# Altium PCB FlightController_Top_6x6.PcbDoc (part 6 of 6)
Units mm, origin at the board's own origin, x right, y up, seen from the top; angles counter-clockwise.
Board outline 149.8 x 149.8 mm, 2 copper layers (Top Layer, Bottom Layer); 156 components, 166 nets, 860 pads, 423 vias.
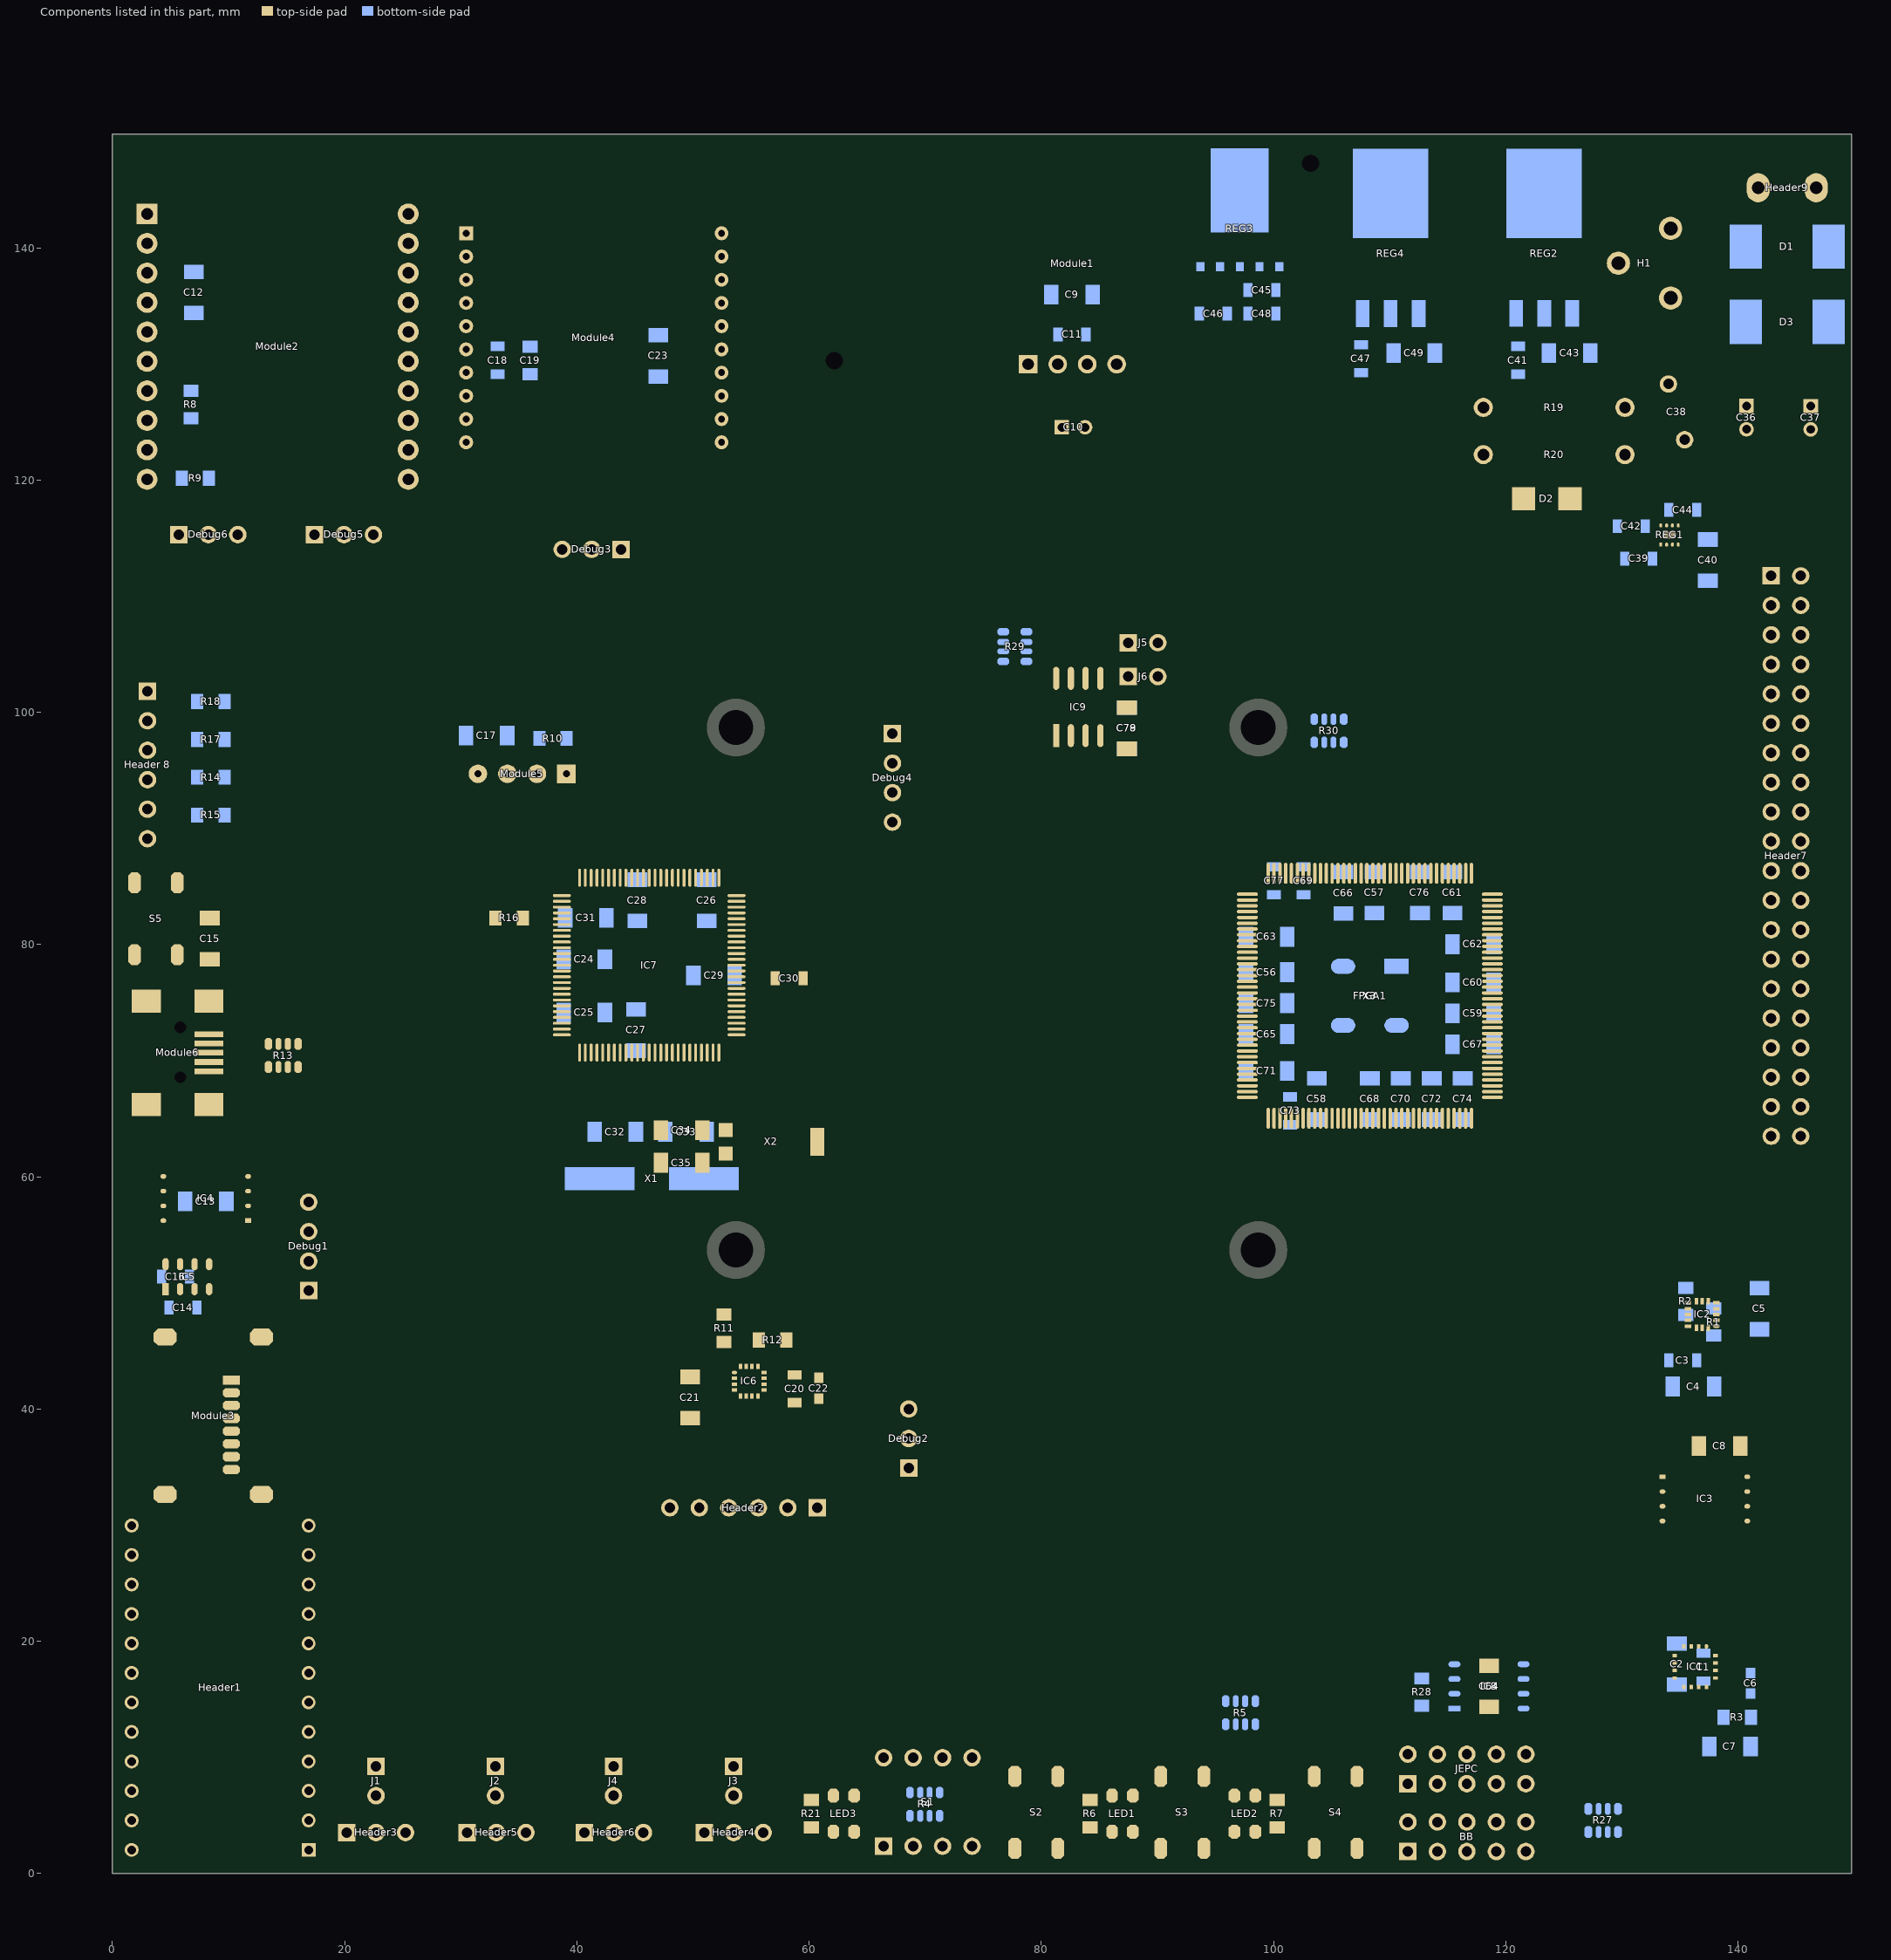
[diagram p6: the components of this part, seen from the top]

## Polygon pours and split planes (outlines as drawn) (continued)
no net on Top Layer "Socket Keepout" (solid, pour order 23): 23.876,118.618 27.305,118.618 27.305,145.161 24.13,145.161 24.003,145.288
no net on Top Layer "Socket Keepout" (solid, pour order 25): 4.191,87.757 4.191,103.378 1.524,103.378 1.524,87.757
no net on Top Layer "Socket Keepout" (solid, pour order 27): 18.167,59.092 18.167,48.932 15.627,48.932 15.627,59.092
no net on Top Layer "Socket Keepout" (solid, pour order 31): 3.048,0.254 0.254,0.254 0.254,31.496 3.048,31.496
no net on Top Layer "Socket Keepout" (solid, pour order 35): 17.907,31.242 15.875,31.242 15.875,0.635 18.034,0.635
no net on Top Layer "Socket Keepout" (solid, pour order 37): 21.433,10.511 23.973,10.511 23.973,5.431 21.433,5.431
no net on Top Layer "Socket Keepout" (solid, pour order 39): 18.893,2.256 26.513,2.256 26.543,2.286 26.543,4.699 18.923,4.699
no net on Top Layer "Socket Keepout" (solid, pour order 43): 29.21,4.826 36.83,4.826 36.885,4.771 36.885,2.256 29.265,2.256
no net on Top Layer "Socket Keepout" (solid, pour order 45): 39.382,2.256 39.37,2.268 39.37,4.953 46.99,4.953 47.002,4.941 47.002,2.256
no net on Top Layer "Socket Keepout" (solid, pour order 49): 49.699,2.256 49.699,4.995 49.784,5.08 57.404,5.08 57.404,2.341 57.319,2.256
no net on Top Layer "Socket Keepout" (solid, pour order 51): 54.779,10.511 52.239,10.511 52.239,5.431 54.779,5.431
no net on Top Layer "Socket Keepout" (solid, pour order 53): 44.42,5.431 44.42,10.511 41.88,10.511 41.88,5.431
no net on Top Layer "Socket Keepout" (solid, pour order 55): 31.72,10.511 34.26,10.511 34.26,5.431 34.163,5.334 31.623,5.334
no net on Top Layer "Socket Keepout" (solid, pour order 63): 65.081,8.81 65.151,8.88 65.151,11.43 75.438,11.43 75.381,11.373 75.381,8.81
no net on Top Layer "Socket Keepout" (solid, pour order 65): 75.381,3.51 75.381,0.451 75.311,0.381 65.151,0.381 65.151,3.44 65.081,3.51
no net on Top Layer "Socket Keepout" (solid, pour order 67): 110.309,5.702 123.009,5.702 123.009,0.622 110.309,0.622
no net on Top Layer "Socket Keepout" (solid, pour order 69): 110.309,11.544 123.009,11.544 123.009,6.464 110.309,6.464
no net on Top Layer "Socket Keepout" (solid, pour order 71): 67.31,41.275 69.85,41.275 69.85,33.655 67.31,33.655
no net on Top Layer "Socket Keepout" (solid, pour order 73): 46.736,32.766 61.976,32.766 61.976,30.226 46.736,30.226
no net on Top Layer "Socket Keepout" (solid, pour order 75): 65.913,99.441 68.453,99.441 68.453,89.281 65.913,89.281
no net on Top Layer "Socket Keepout" (solid, pour order 77): 86.233,107.275 91.313,107.275 91.313,104.735 86.233,104.735
no net on Top Layer "Socket Keepout" (solid, pour order 79): 86.36,104.354 91.313,104.354 91.313,101.814 86.233,101.814
no net on Top Layer "Socket Keepout" (solid, pour order 81): 140.716,127.889 141.605,127.889 142.113,127.381 142.875,126.619 142.875,126.365 142.875,124.968 143.129,124.714 142.621,124.206 142.621,123.825 141.859,123.825 140.843,122.809 140.589,123.063 139.827,123.063 139.573,123.063 138.938,123.698 138.303,124.333 138.303,125.095 138.303,126.111 138.811,126.619 139.573,127.381 139.573,127.508
no net on Top Layer "Socket Keepout" (solid, pour order 83): 144.78,127.381 144.78,123.571 144.907,123.444 145.288,123.063 145.669,123.063 147.193,123.063 147.32,123.19 147.828,123.698 147.955,123.698 147.955,127.254 147.828,127.381 147.574,127.635 146.304,127.635 145.288,127.635
GND on Top Layer "GND Top Poly" (solid, pour order 88): -0.005,149.769 -0.005,-0.031 149.795,-0.031 149.795,149.769
GND on Bottom Layer "GND Bottom Poly" (solid, pour order 90): 0,149.821 0,0.021 149.8,0.021 149.8,149.821

## Keep-outs
Top Layer:
  lines w0.254: 27.061,43.824 cw(c18.733,36.894) 29.337,34.671 ; 27.559,36.068 ccw(c24.24,40.102) 28.345,43.334
Keep-Out Layer:
  the board outline again, w0.3

## Other copper
Top Layer:
  text "The Ad-Flier!" at 25.273,51.435 h2.54 r270
  text "Team Sky Lights" at 21.844,37.465 h1.52 r270

## Silkscreen, mask and mechanical layers (free items; w line width, h text height)
Top Paste:
  rectangle: 134.493,30.353 139.827,34.163
  rectangle: 5.334,56.252 10.744,60.071
Top Solder:
  rectangle: 5.334,56.252 10.744,60.071
  rectangle: 134.493,30.353 139.827,34.163

## Text inside footprints (layer, text, board x,y; h text height)
BB: Top Overlay "2" at 108.912,3.924 h1.27; Top Overlay "1" at 109.42,1.384 h1.27
C10: Top Overlay "+" at 78.799,123.807 h1.5
C36: Top Overlay "+" at 139.994,129.361 h1.5 r270
C37: Top Overlay "+" at 145.524,129.354 h1.5 r270
Header7: Top Overlay "2" at 144.907,114.427 h1.27 r270; Top Overlay "1" at 142.367,114.3 h1.27 r270
JEPC: Top Overlay "2" at 108.942,9.863 h1.27; Top Overlay "1" at 109.323,7.196 h1.27